# Altium PCB pwr_regulator_pcb.PcbDoc
Units mm, origin at the board's own origin, x right, y up, seen from the top; angles counter-clockwise.
Board outline 27.5 x 17 mm, 4 copper layers (S1, GND, PWR, S2), stack 0.603 mm thick; 11 components, 9 nets, 33 pads, 9 vias.
Unrouted connection lines stored in the file: 1.
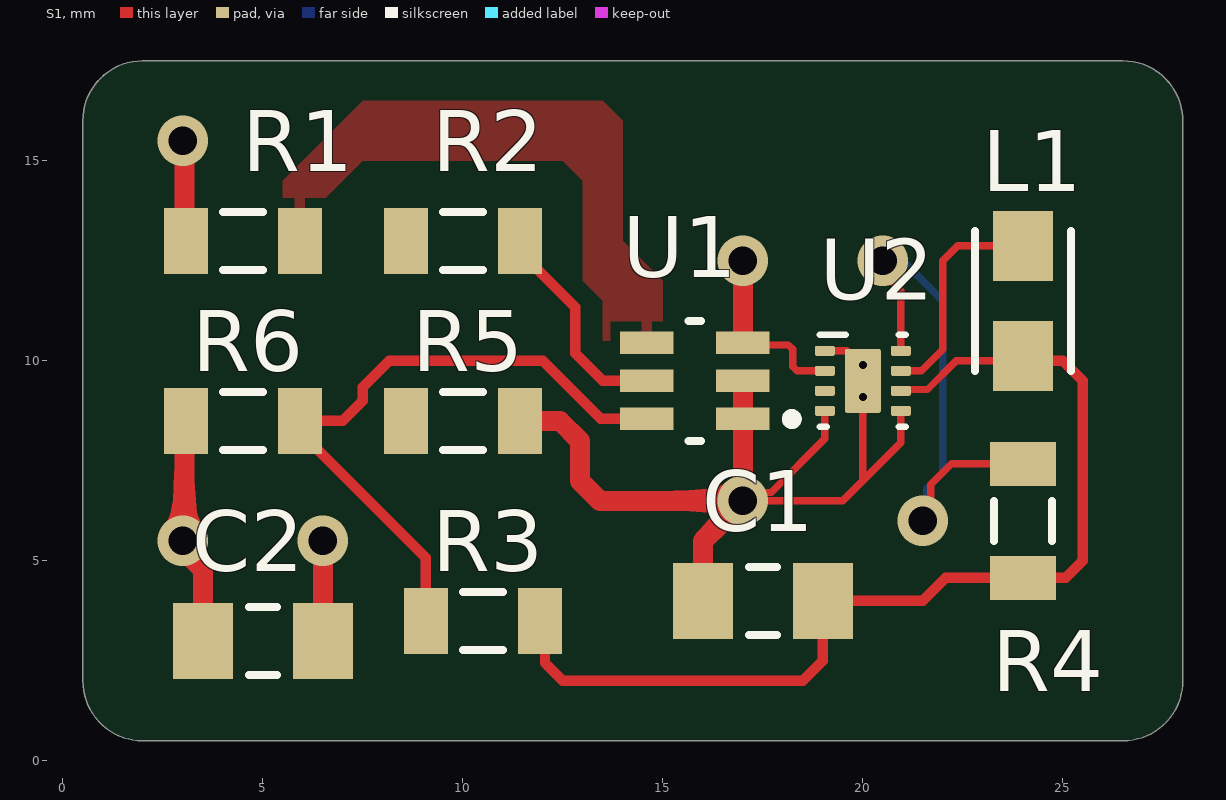
[diagram p0: S1 view]
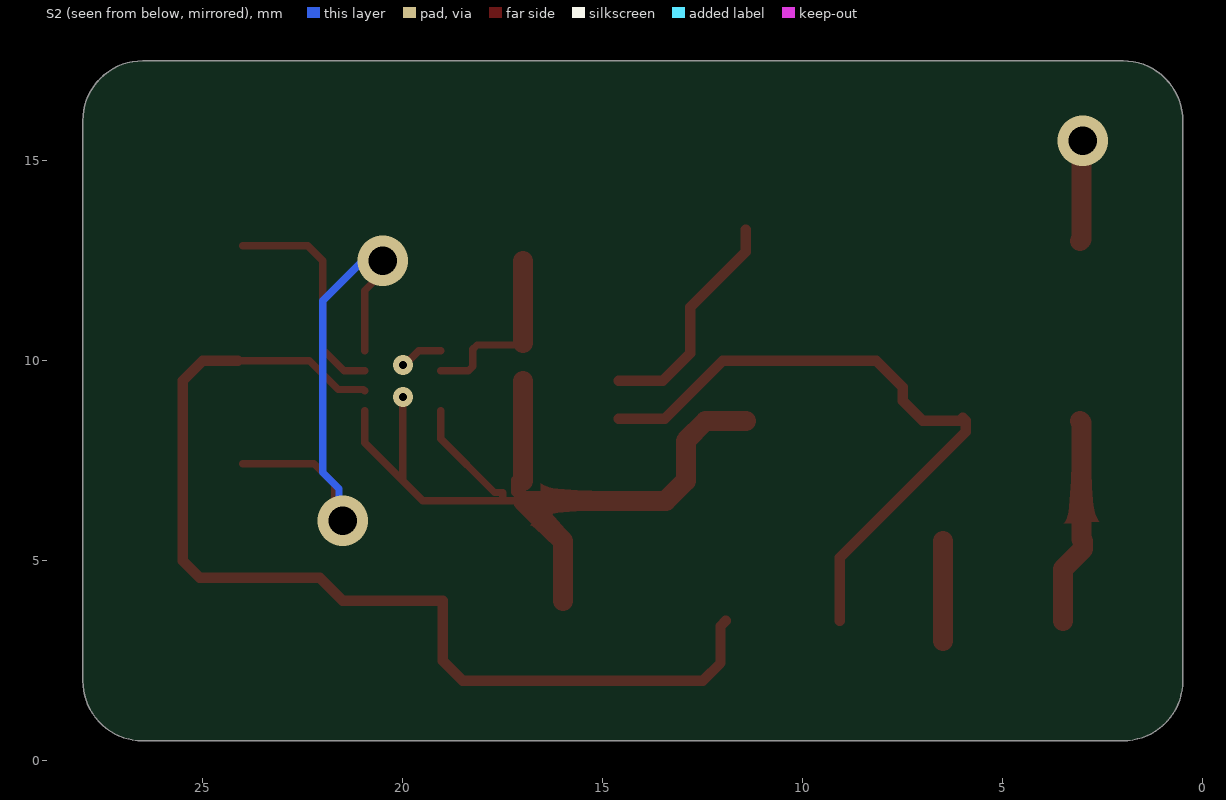
[diagram p1: S2 view, seen from below]
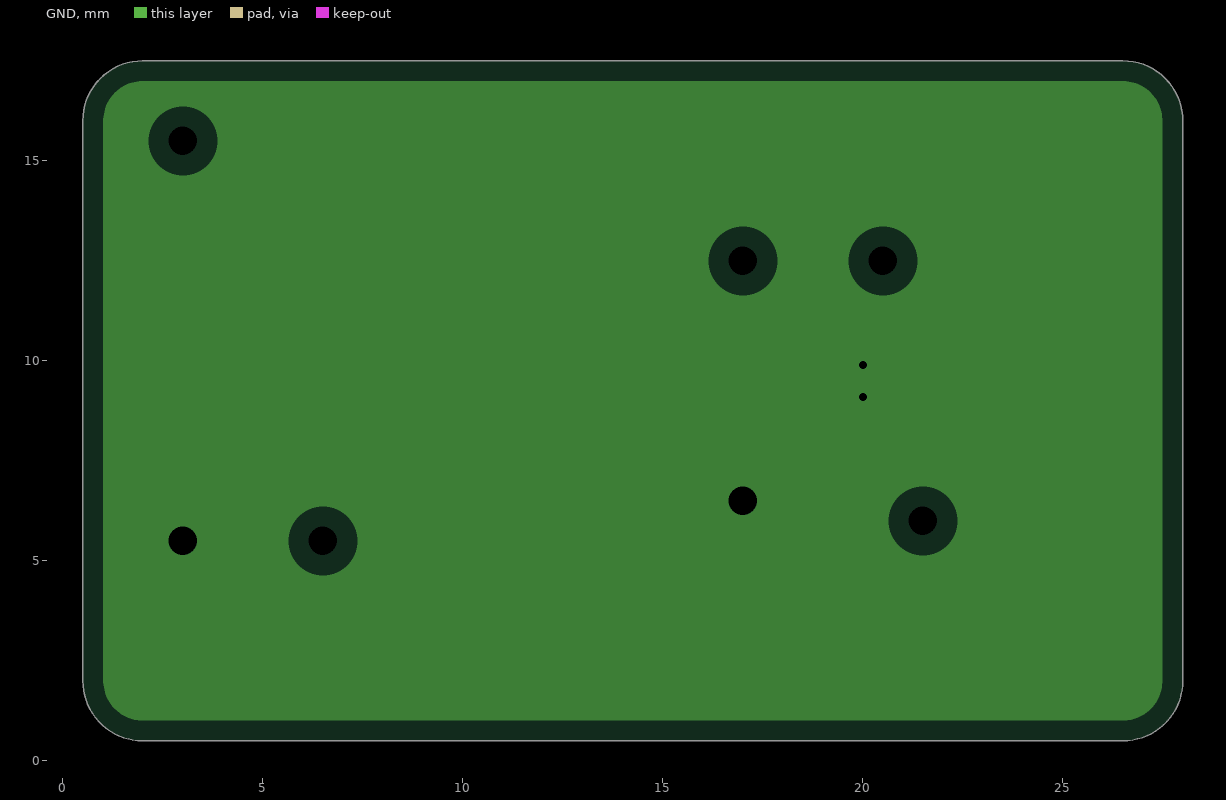
[diagram p2: GND, clearances drawn from the general rule]
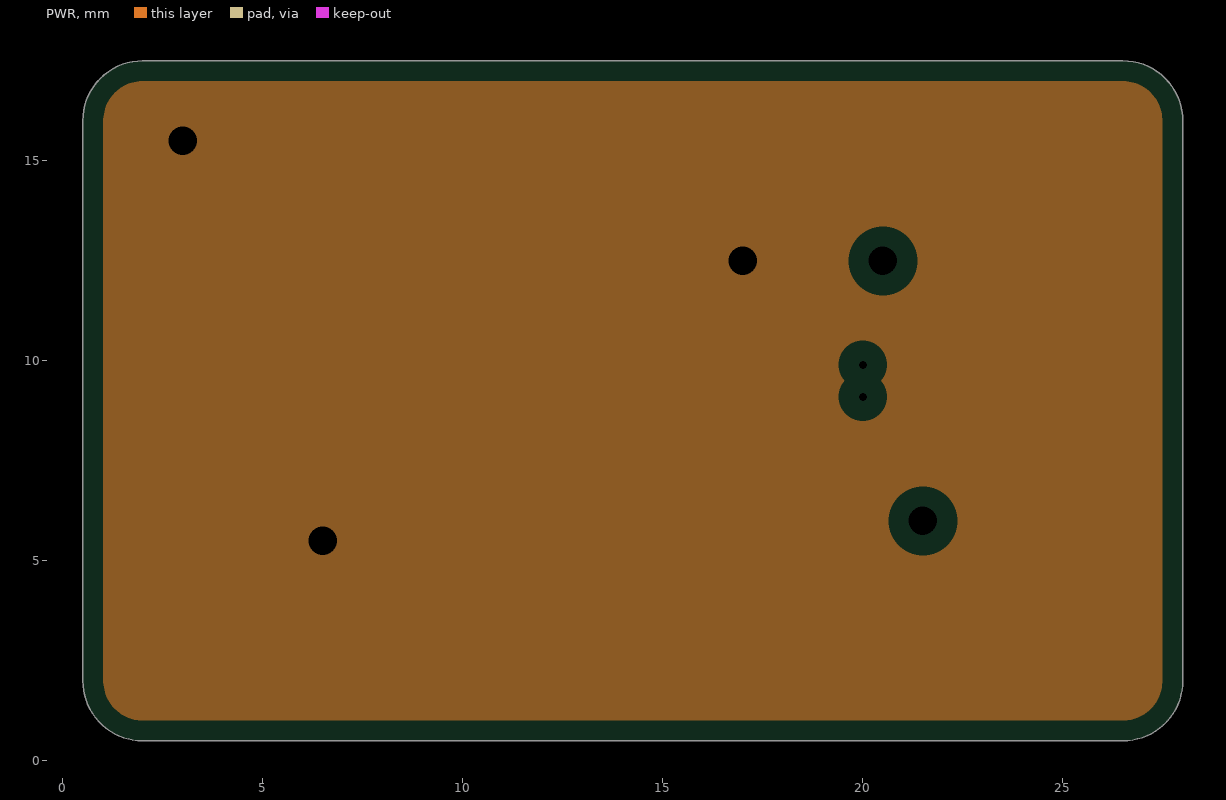
[diagram p3: PWR, clearances drawn from the general rule]

## Layer stack, top to bottom
Top Solder: solder mask 0.0102, Solder Resist, Dk 3.5
S1: signal copper 0.0356
Dielectric 2: prepreg 0.0711, PP-006, Dk 4.1
GND: plane copper 0.035, net GND
Dielectric 1: core 0.32, FR-4, Dk 4.8
PWR: plane copper 0.035, net V_IN
Dielectric 3: prepreg 0.0711, PP-006, Dk 4.1
S2: signal copper 0.0356
Bottom Solder: solder mask 0.0102, Solder Resist, Dk 3.5

## Board outline
2,0.5 cw(c2,2) 0.5,2 0.5,16 cw(c2,16) 2,17.5 26.5,17.5 cw(c26.5,16) 28,16 28,2 cw(c26.5,2) 26.5,0.5

## Design rules (kind name [scope] priority, off if disabled: settings)
Clearance [All] p1: gap=0.254 ignorepadtopadclearanceinfootprint=TRUE
PlaneClearance [All] p1: clearance=0.508
PlaneConnect [All] p1: planeconnectstyle=Relief reliefexpansion=0.508 reliefentries=4 reliefconductorwidth=0.254 reliefairgap=0.254
PolygonConnect [All] p1: connectstyle=Relief reliefconductorwidth=0.254 reliefentries=4 polygonreliefangle="90 Angle" airgapwidth=0.254
RoutingVias [All] p1: holewidth=0.711 width=1.27 viastyle="Through Hole" minholewidth=0.711 minwidth=1.27 maxholewidth=0.711 maxwidth=1.27
SolderMaskExpansion [All] p1: expansion=0.102 istentingtop=FALSE
SupplyNets "Schematic Supply Nets_1" [InNet('GND')] p1: voltage=0.000
SupplyNets "Schematic Supply Nets" [InNet('V_IN')] p2: voltage=0.000
Width [All] p1: maxlimit=5 minlimit=0.1 preferedwidth=0.254
28 further rules are at their usual default settings.

## Components (designator, comment, footprint, x,y, rotation, side; value= is the part's Value field where it differs from the comment)
C1 "22uF" KEMT-1206-2_M 17.5,4 r0 top
C2 "10uF" KEMT-1206-2_M 5,3 r0 top
L1 "2.2uH" FP-LQH31CN_03-MFG 24,11.5 r270 top
R1 "10K" RESC3216X70X50NL05T20 4.5,13 r180 top
R2 "10K" RESC3216X70X50NL05T20 10,13 r180 top
R3 "100K" RESC3216X70X50NL05T20 10.5,3.5 r0 top
R4 "100K" RESC3216X70X50NL05T20 24,6 r270 top
R5 "100K" RESC3216X70X50NL05T20 10,8.5 r180 top
R6 "100K" RESC3216X70X50NL05T20 4.5,8.5 r0 top
U1 "MAX16150AUT+T" FP-U6-1-MFG 15.8,9.5 r180 top
U2 "TPS62162DSGT" DSG0008A_V 20,9.5 r0 top

## Footprints (in the part's own frame and the unit in brackets; to place one, negate y for a bottom-side part, rotate by r counter-clockwise, add the part's x,y. Pads: shape width x height; smd on the part's side, far side on the other; paste and mask are expansions set on the pad)
DSG0008A_V [mm] "SON, 8-Leads, Body 2x2mm, Pitch 0.5mm, Thermal Pad 1.6x0.9mm, TI Recommended"
  rrect40% 0.5x0.25 smd: 1(-0.95,0.75) 2(-0.95,0.25) 3(-0.95,-0.25) 4(-0.95,-0.75) 5(0.95,-0.75) 6(0.95,-0.25) 7(0.95,0.25) 8(0.95,0.75)
  rrect11% 0.9x1.6 smd paste-0.45: 9(0,0)
  silkscreen extent -1.07,-1.15 1.07,1.15, body extent -1.05,-1.05 1.05,1.05, height 0.8
FP-LQH31CN_03-MFG [mm]
  rect 1.75x1.5 smd paste+0 mask+0: 1(-1.375,0) 2(1.375,0)
  silkscreen extent -1.75,-1.2 1.75,1.2, body extent -2.35,-1 2.35,1, height 0.25
FP-U6-1-MFG [mm]
  rect 1.33x0.56 smd paste+0 mask+0: 1(-1.2,0.95) 2(-1.2,0) 3(-1.2,-0.95) 4(1.2,-0.95) 5(1.2,0) 6(1.2,0.95)
  silkscreen extent -2.55,-1.5 0.16,1.5, body extent -1.96,-1.73 1.96,1.73, height 0.25
KEMT-1206-2_M [mm] "SMD, 2-Leads, Body 3.4x1.8mm, IPC Low Density"
  rect 1.5x1.9 smd: 1(-1.5,0) 2(1.5,0)
  silkscreen extent -0.35,-0.85 0.35,0.85, body extent -1.7,-0.9 1.7,0.9, height 0.88
RESC3216X70X50NL05T20 [mm] "Chip Resistor, 2-Leads, Body 3.20x1.60mm, IPC Medium Density"
  rect 1.1x1.65 smd: 1(-1.425,0) 2(1.425,0)
  silkscreen extent -0.5,-0.72 0.5,0.72, body extent -1.63,-0.82 1.62,0.82, height 0.7

## Part data
C1 C2: library part CMP-1037-04202-2, "CAP, Ceramic, 0.1 uF, +/- 10%, 50 V, -55 to 125 degC, 1206 (3216 Metric), RoHS, Tape and Reel", Capacitance=0.1µF, Capacitance Tolerance=±10%, Capacitor Case Style=1206[3216Metric], Dielectric Characteristic=X7R, Manufacturer=Kemet, Operating Temperature Max=125degC, Operating Temperature Min=-55degC, Package Description="2-Leads SMD, Body 3.2 x 1.6 mm", Package Reference=1206-2, Voltage Rating=50V, Datasheet URL=https://datasheet.ciiva.com/6125/1725438-6125494.pdf, Datasheet Version=Jul-13, Manufacturer URL=http://www.kemet.com/, Packaging=Tape&Reel, Product Range=KEMET-CSeries, SVHC=ToBeAdvised
L1: library part CMP-06042-002030-1, "Wire Wound Ferrite Inductor for General Circuits 56μH ±10% 11.57Ω 50mA 1206", Case Code (Imperial)=1206, Case Code (Metric)=3216, Current Rating=50mA, DC Resistance (DCR)=8.9R, Inductance=56uH, Inductance Tolerance=10%, Max Operating Temperature=85°C, Min Operating Temperature=-25°C, Package Quantity=2000, Resistor Type=Wirewound, Self Resonant Frequency=9MHz, Test Frequency=1MHz, Case/Package=1206, Core Material=Ferrite, DC Current=50mA, Depth=1.8mm, Height=0.071inch, Height - Seated (Max)=0.079inch, Length=0.126inch, Max DC Current=50mA, Military Standard=Not, Mount="Surface Mount", Number of Pins=2, Packaging="Tape and Reel", Q Factor=40, Radiation Hardening=No, REACH SVHC="No SVHC", Shielding=Unshielded, Termination=SMD/SMT, Tolerance=10%, Weight=0.001023oz, Width=1.6mm
R1 R2 R3 R4 R5 R6: library part CMP-2003-00541-1, Manufacturer=Panasonic, Part Number=ERJ-8GEY0R00V
U1: library part CMP-05723-001129-1, "IC SUPERVISOR 1 CHANNEL SOT23-6"
U2: library part CMP-0323-00319-3, "Buck Step Down Regulator with 3 to 17 V Input and 3.3 V Output, -40 to 85 degC, 8-Pin WSON (DSG), Green (RoHS & no Sb/Br)", Manufacturer="Texas Instruments", Rating=Catalog, Switch Current Limit(Typ)(A)=1.8, Code_JEDEC=MO-229, ComponentLink1Description=Datasheet, ComponentLink1URL=http://www.ti.com/general/docs/lit/getliterature.tsp?genericPartNumber=TPS62162&fileType=pdf, ComponentLink2Description="Package Specification", ComponentLink2URL=http://www.ti.com/litv/pdf/mpds308a, ComponentLink3Description="URL Link1", ComponentLink3URL="Samples URL:http://www.ti.com/product/tps54611#samples", DatasheetVersion=SLVSAM2A, Duty Cycle(Max)(%)=100, Eco-Plan="Green (RoHS & no Sb/Br)", Iout(Max)(A)=1, Iq(Typ)(mA)=0.017, Mounting Technology="Surface Mount", PackageDescription="8-Pin Plastic Small Outline No-Lead, 2 x 2 x 0.8 mm Body, 0.5 mm Pitch, Exposed Pad", PackageReference=DSG0008A, PackageVersion="revB, Oct-2010", PartNumber=TPS62162DSGT, Preset Vout(V)=3.3, Regulated Outputs(#)=1, SubFamily="Step-Down Regulator", Synchronous Rectification=TRUE, Topology=Buck, Vin(Max)(V)=17, Vin(Min)(V)=3, Vout(Max)(V)=3.3, Vout(Min)(V)=3.3

## Via types
v1: diameter 1.27, hole 0.711, S1 to S2, 3 vias
v2: diameter 0.5, hole 0.2, S1 to S2, 2 vias
v3: diameter 1.27, hole 0.711, S1 to PWR, 2 vias
v4: diameter 1.27, hole 0.711, S1 to GND, 2 vias

## Nets (pads, with @x,y where several pads share a name; then routed paths per layer and width w, separated by ;. In a path a pad name is that pad's centre, name@x,y a point inside that pad or via, vN(x,y) a via of type N, cw(c..) or ccw(c..) an arc to the next point about the centre after c; other vN are vias at no path point)
+3V3_EN: R1.1 U1.4
GND: C1.1 C2.1 R5.1 R6.1 U1.1 U1.2 U2.1 U2.4 U2.5 U2.9 | length 30.2
  S1 w0.18: v4@17.15,6.85 17,6.7 v4(17,6.5) ; v4@17.209,7.034 17.209,6.709 v4(17,6.5) ; U2.4 19.05,8.05 17.709,6.709 17.504,6.709 17.5,6.705 v4@17.5,6.5 ; U2.1 19.6,10.25 19.95,9.9 v2(20,9.9) ; v2(20,9.1) 20,7 ; U2.5 20.95,7.95 20,7 ; v4(17,6.5) v4@17.5,6.5 ; v4@17.5,6.5 19.5,6.5 20,7
  S1 w0.5: R6.1 3.037,8.463 3.037,5.537 v4(3,5.5) 3,5.292 3.5,4.792 C2.1@3.5,3.5 ; R5.1 11.432,8.493 12.432,8.493 12.925,8 12.925,7 13.425,6.5 v4(17,6.5) 16,5.5 C1.1 ; v4@17,7 U1.1 U1.2
NetC1_2: C1.2 L1.2 R3.2 R4.2 U2.6 | length 26.4
  S1 w0.18: U2.6 20.981,9.281 21.615,9.281 22.334,10 L1.2@24.125,10
  S1 w0.254: R3.2 12.057,3.368 12.057,2.443 12.5,2 18.5,2 19,2.5 C1.2 21.5,4 22.075,4.575 R4.2 25.075,4.575 25.5,5 25.5,9.5 25,10 L1.2@24.125,10
NetL1_1: L1.1 U2.7 | length 5.6
  S1 w0.18: U2.7 21.47,9.75 22,10.28 22,12.5 22.375,12.875 L1.1
NetR2_1: R2.1 U1.5 | length 5.7
  S1 w0.254: R2.1@11.425,13.275 R2.1 11.425,12.725 12.813,11.337 12.813,10.187 13.5,9.5 U1.5
NetR5_2: R5.2 U2.3
PG: R4.1 U2.8 | length 13.6
  S1 w0.18: v1(20.5,12.5) 20.5,12.205 20.95,11.755 U2.8 ; v1(21.5,6) 21.7,6.2 21.7,6.905 22.22,7.425 R4.1
  S2 w0.18: v1(20.5,12.5) 21,12.5 22,11.5 22,7.205 21.595,6.8 21.595,6.095 v1(21.5,6)
V_IN: C2.2 R1.2 U1.3 U2.2 | length 9.7
  S1 w0.18: U1.3 17.055,10.395 18.145,10.395 18.25,10.289 18.25,9.855 18.355,9.75 U2.2
  S1 w0.5: v1(3,15.5) 3.038,15.462 3.038,13.037 R1.2 ; C2.2 v3(6.5,5.5) ; U1.3 v3(17,12.5)
Vmon1: R3.1 R6.2 U1.6 | length 16.5
  S1 w0.254: R6.2@6,8.575 R6.2 ; R3.1 9.075,5.075 5.925,8.225 R6.2 ; U1.6 13.45,8.55 12,10 8.161,10 7.5,9.339 7.5,9 7,8.5 R6.2
pads on no net: R2.2

## Polygon pours and split planes (outlines as drawn)
+3V3_EN on S1 "+3V3_EN_L01_P000" (solid, pour order 0): 6.5,14 7.5,15 12.5,15 13,14.5 13,12 13.5,11.5 13.5,10.5 15,10.5 15,12 14,13 14,16 13.5,16.5 7.5,16.5 5.5,14.5 5.5,12.5 6.5,12.5
GND on GND (split plane): 26.629,16.983 26.757,16.958 26.879,16.916 26.996,16.859 27.104,16.787 27.201,16.701 27.287,16.604 27.359,16.496 27.416,16.379 27.458,16.257 27.483,16.129 27.491,16.012 27.49,16 27.49,2 27.491,1.988 27.483,1.871 27.458,1.743 27.416,1.621 27.359,1.504 27.287,1.396 27.201,1.299 27.104,1.213 26.996,1.141 26.879,1.084 26.757,1.042 26.629,1.017 26.512,1.009 26.5,1.01 2,1.01 1.988,1.009 1.871,1.017 1.743,1.042 1.621,1.084 1.504,1.141 1.396,1.213 1.299,1.299 1.213,1.396 1.141,1.504 1.084,1.621 1.042,1.743 1.017,1.871 1.009,1.988 1.01,2 1.01,16 1.009,16.012 1.017,16.129 1.042,16.257 1.084,16.379 1.141,16.496 1.213,16.604 1.299,16.701 1.396,16.787 1.504,16.859 1.621,16.916 1.743,16.958 1.871,16.983 1.988,16.991 2,16.99 26.5,16.99 26.512,16.991
V_IN on PWR (split plane): 26.629,16.983 26.757,16.958 26.879,16.916 26.996,16.859 27.104,16.787 27.201,16.701 27.287,16.604 27.359,16.496 27.416,16.379 27.458,16.257 27.483,16.129 27.491,16.012 27.49,16 27.49,2 27.491,1.988 27.483,1.871 27.458,1.743 27.416,1.621 27.359,1.504 27.287,1.396 27.201,1.299 27.104,1.213 26.996,1.141 26.879,1.084 26.757,1.042 26.629,1.017 26.512,1.009 26.5,1.01 2,1.01 1.988,1.009 1.871,1.017 1.743,1.042 1.621,1.084 1.504,1.141 1.396,1.213 1.299,1.299 1.213,1.396 1.141,1.504 1.084,1.621 1.042,1.743 1.017,1.871 1.009,1.988 1.01,2 1.01,16 1.009,16.012 1.017,16.129 1.042,16.257 1.084,16.379 1.141,16.496 1.213,16.604 1.299,16.701 1.396,16.787 1.504,16.859 1.621,16.916 1.743,16.958 1.871,16.983 1.988,16.991 2,16.99 26.5,16.99 26.512,16.991